# Altium PCB USB_1.0_ZM_20210719.PcbDoc
Units mm, origin at the board's own origin, x right, y up, seen from the top; angles counter-clockwise.
Board outline 15 x 23 mm, 2 copper layers (Top Layer, Bottom Layer); 2 components, 4 nets, 19 pads, 9 vias.
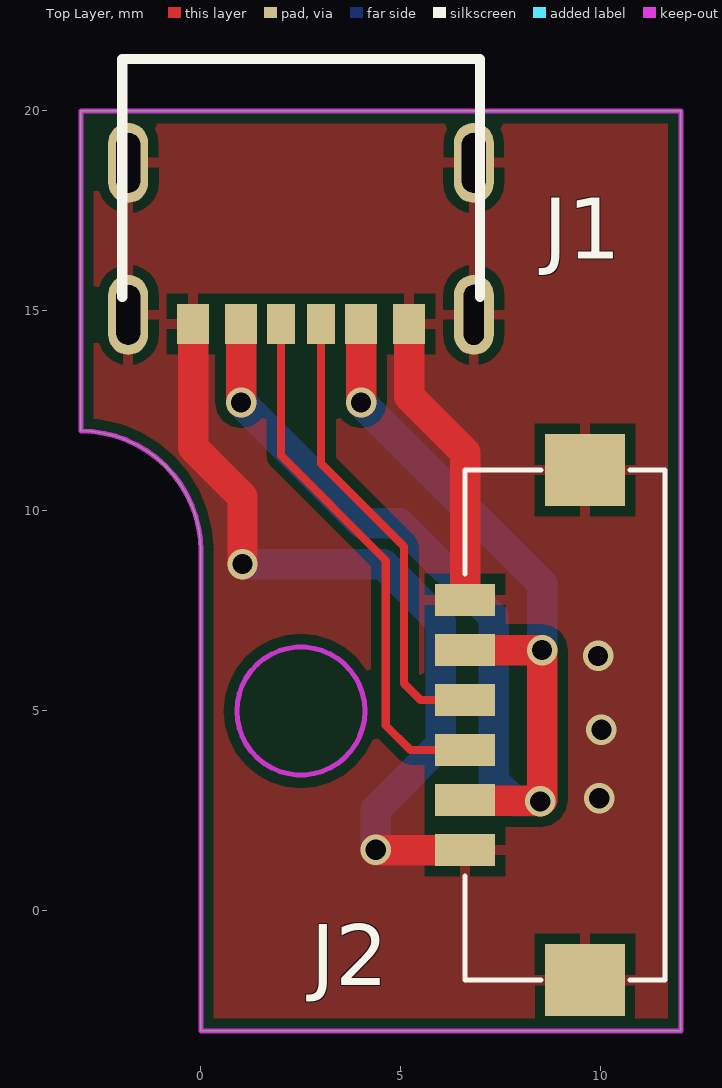
[diagram p0: Top Layer view]
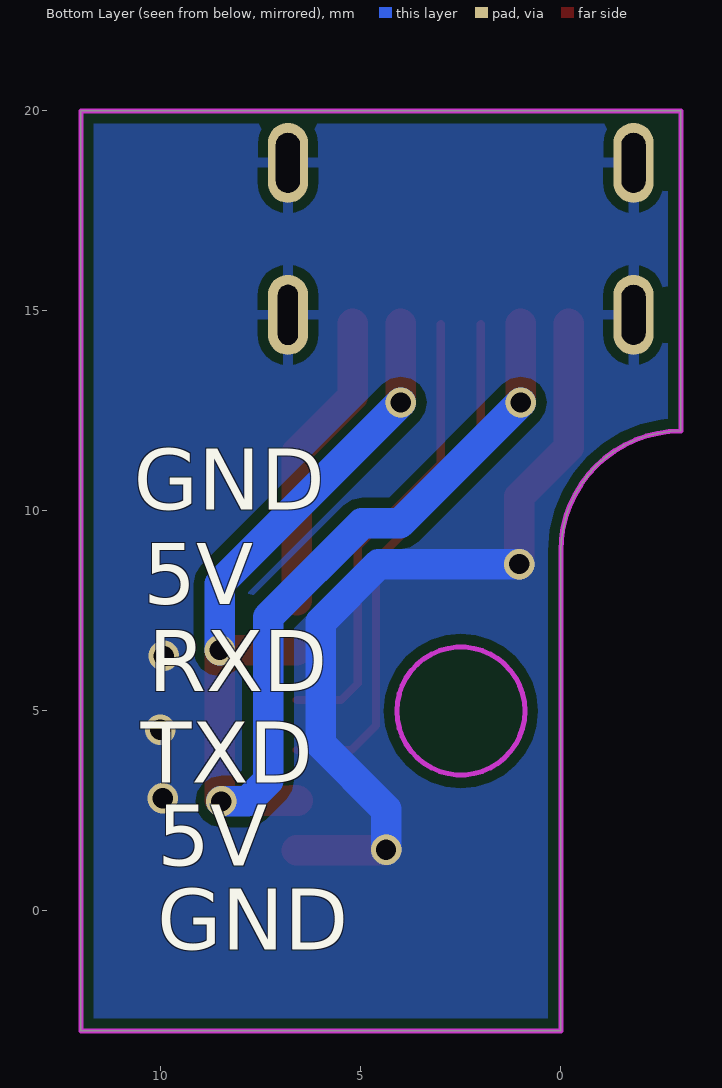
[diagram p1: Bottom Layer view, seen from below]

## Layer stack, top to bottom
Top Solder: solder mask 0.0102, Solder Resist, Dk 3.5
Top Layer: signal copper 0.0356
Dielectric1: dielectric 0.32, FR-4, Dk 4.8
Bottom Layer: signal copper 0.0356
Bottom Solder: solder mask 0.0102, Solder Resist, Dk 3.5

## Board outline
0,-3 0,9 ccw(c-3,9) -3,12 -3,20 12,20 12,-3

## Design rules (kind name [scope] priority, off if disabled: settings)
Clearance [All] p1: gap=0.254
PolygonConnect PolygonConnect_1 [IsVia] p1: connectstyle=Direct reliefconductorwidth=0.254 reliefentries=4 polygonreliefangle="90 Angle" airgapwidth=0.254
PolygonConnect [All] p2: connectstyle=Relief reliefconductorwidth=0.254 reliefentries=4 polygonreliefangle="90 Angle" airgapwidth=0.254
RoutingVias [All] p1: holewidth=0.711 width=1.27 viastyle="Through Hole" minholewidth=0.711 minwidth=1.27 maxholewidth=0.711 maxwidth=1.27
SilkToSolderMaskClearance SilkscreenOverComponentPads [IsPad] p1: minsilkscreentomaskgap=0.254 clearancetoexposedcopper=TRUE
SolderMaskExpansion [All] p1: expansion=0.102
Width [All] p1: maxlimit=5.08 minlimit=0.152 preferedwidth=0.254
29 further rules are at their usual default settings.

## Components (designator, comment, footprint, x,y, rotation, side; value= is the part's Value field where it differs from the comment)
J1 "TYPE-C" USB-TYPE-C-6P 2.503,16.802 r180 top
J2 "6×1.25mmSMT" 6×1.25mmSMT 6.604,1.524 r90 top

## Footprints (in the part's own frame and the unit in brackets; to place one, negate y for a bottom-side part, rotate by r counter-clockwise, add the part's x,y. Pads: shape width x height; smd on the part's side, far side on the other; paste and mask are expansions set on the pad)
6×1.25mmSMT [mm]
  rect 1.8x2 smd: 0(-3.25,-3) 0(9.5,-3)
  rect 0.8x1.5 smd: 1(0,0) 2(1.25,0) 3(2.5,0) 4(3.75,0) 5(5,0) 6(6.25,0)
  round 0.5 on Top Overlay: ""(-0.875,0.432)
  silkscreen extent -3.25,-5 9.5,0
USB-TYPE-C-6P [mm] "USN MINI"
  oval 1x2 hole 0.6 slot 1.5 at 90 deg: 0(-4.32,-1.9) 0(4.32,-1.9) 0(4.32,1.9)
  oval 1x2 hole 0.5 slot 1.5 at 90 deg: 0(-4.32,1.9)
  rect 0.8x1 smd: 1(-2.7,2.126) 2(-1.5,2.126) 5(1.5,2.126) 6(2.7,2.126)
  rect 0.7x1 smd: 3(-0.5,2.126) 4(0.5,2.126)
  silkscreen extent -4.47,-4.5 4.47,1.45, body extent -4.47,-5.21 4.47,2.69, height 3.08

## Part data
J1 J2: library part SIP-6, "USB 3.1 Type-C 2.0短体母座 6P贴片式"

## Via types
v1: diameter 0.762, hole 0.508, Top Layer to Bottom Layer, tented both sides, 9 vias

## Nets (pads, with @x,y where several pads share a name; then routed paths per layer and width w, separated by ;. In a path a pad name is that pad's centre, name@x,y a point inside that pad or via, vN(x,y) a via of type N, cw(c..) or ccw(c..) an arc to the next point about the centre after c; other vN are vias at no path point)
GND: J1.0 J1.1 J1.6 J2.0 J2.1 J2.6 | length 28.2
  Top Layer w0.762: J1.6 -0.197,11.59 1.04,10.354 v1(1.04,8.673) ; v1(4.37,1.529) 4.376,1.524 J2.1 ; J1.1 5.203,12.872 6.604,11.471 J2.6
  Bottom Layer w0.762: v1(1.04,8.673) 4.553,8.673 5.999,7.227 5.999,4.167 4.37,2.538 v1(4.37,1.529)
  other v1: 9.958,2.819 10.014,4.531 9.93,6.376
NetJ1_3: J1.3 J2.4 | length 11.5
  Top Layer w0.203: J1.3 3.003,11.185 5.079,9.11 5.079,5.688 5.493,5.274 J2.4
NetJ1_4: J1.4 J2.3 | length 13.4
  Top Layer w0.203: J1.4 2.003,11.385 4.621,8.767 4.621,4.641 5.239,4.024 J2.3
V5.0: J1.2 J1.5 J2.2 J2.5 | length 33.7
  Top Layer w0.762: v1(1.003,12.713) J1.5 ; v1(4.003,12.713) J1.2 ; J2.2@6.582,2.759 v1@8.467,2.759 ; J2.2 J2.2@6.731,2.774 ; J2.5 v1(8.528,6.524) 8.528,2.779 v1(8.487,2.739)
  Bottom Layer w0.762: v1(1.003,12.713) 4.027,9.689 4.974,9.689 7.322,7.341 7.322,3.256 7.839,2.739 v1(8.487,2.739) ; v1(4.003,12.713) 8.534,8.182 v1@8.534,6.518
pads on no net: J2.

## Polygon pours and split planes (outlines as drawn)
GND on Top Layer "Top Layer-No Net" (solid, remove dead copper, pour order 0): -5.514,22.356 -4.65,21.491 18.069,21.491 18.069,-0.285 14.375,-3.98 14.296,-3.901 6.788,-3.901 -3.51,-3.901 -5.396,-2.014 -5.161,-1.778 -5.161,21.648
GND on Bottom Layer "Top Layer-No Net" (solid, remove dead copper, pour order 2): -5.514,22.356 -4.65,21.491 18.069,21.491 18.069,-0.285 14.375,-3.98 14.296,-3.901 6.788,-3.901 -3.51,-3.901 -5.396,-2.014 -5.161,-1.778 -5.161,21.648

## Keep-outs
Keep-Out Layer:
  circle w0.127: c2.5,5 r1.6
  lines w0.127: 6.97,20 12,20 12,-3 0,-3 0,9 ccw(c-3,9) -3,12 -3,20 6.97,20

## Silkscreen, mask and mechanical layers (free items; w line width, h text height)
Bottom Overlay:
  text "GND" at 10.681,10.036 h1.52
  text "5V" at 10.437,7.668 h1.52
  text "RXD" at 10.315,5.496 h1.52
  text "TXD" at 10.51,3.202 h1.52
  text "5V" at 10.095,1.127 h1.52
  text "GND" at 10.095,-0.972 h1.52
Mechanical 1:
  circle w0.127: c2.5,5 r1.6
  lines w0.127: 6.97,20 12,20 12,-3 0,-3 0,9 ccw(c-3,9) -3,12 -3,20 6.97,20
Mechanical 2:
  lines w0.127: -1.67,13.695 -1.67,13.495 -1.97,13.495 -1.97,13.695 ; -1.47,13.695 -1.47,13.495 -0.97,13.495 0.45,13.495 ; -0.6,13.495 -0.6,13.405 -0.4,13.405 -0.4,13.495 ; -0.1,13.495 -0.1,13.405 0.1,13.405 0.1,13.495 ; 0.4,13.495 0.4,13.405 0.6,13.405 0.6,13.495 ; 0.9,13.495 0.9,13.405 1.1,13.405 1.1,13.495 ; 1.4,13.495 1.4,13.405 1.6,13.405 1.6,13.495 ; 1.9,13.495 1.9,13.405 2.1,13.405 2.1,13.495 ; 2.9,13.495 2.9,13.405 3.1,13.405 3.1,13.495 ; 3.4,13.495 3.4,13.405 3.6,13.405 3.6,13.495 ; 3.9,13.495 3.9,13.405 4.1,13.405 4.1,13.495 ; 4.4,13.495 4.4,13.405 4.6,13.405 4.6,13.495 ; 4.9,13.495 4.9,13.405 5.1,13.405 5.1,13.495 ; 5.4,13.495 5.4,13.405 5.6,13.405 5.6,13.495 ; 6.67,13.695 6.67,13.495 6.97,13.495 6.97,13.695 ; -1.97,13.695 -0.67,13.695 0.45,13.695 0.45,13.495 ; -1.97,13.695 -1.97,21.305 -0.67,21.305 5.67,21.305 6.97,21.305 ; 0.45,13.495 1.25,13.495 ; 1.25,13.495 3.75,13.495 ; 1.25,13.495 1.25,13.695 3.75,13.695 3.75,13.495 ; 3.75,13.495 4.55,13.495 ; 4.55,13.495 5.97,13.495 6.47,13.495 ; 4.55,13.495 4.55,13.695 5.67,13.695 6.97,13.695 ; 6.47,13.495 6.47,13.695 6.47,13.495 ; 6.97,13.695 6.97,21.305 ; 6.97,13.695 6.97,21.305 ; -0.3,14.925 ccw(c0,14.925) 0,14.625 1.5,14.625 ccw(c1.5,14.725) 1.6,14.725 1.6,14.825 ccw(c1.5,14.825) 1.5,14.925 0.3,14.925 cw(c0.3,15.125) 0.1,15.125 0.1,15.325 cw(c0.3,15.325) 0.3,15.525 1.5,15.525 ccw(c1.5,15.625) 1.6,15.625 1.6,15.725 ccw(c1.5,15.725) 1.5,15.825 0.342,15.825 ccw(c0.342,15.182) -0.3,15.182 -0.3,14.925 ; 3.4,14.725 ccw(c3.5,14.725) 3.5,14.625 5,14.625 ccw(c5,14.925) 5.3,14.925 5.3,15.525 ccw(c5,15.525) 5,15.825 3.5,15.825 ccw(c3.5,15.725) 3.4,15.725 3.4,15.625 ccw(c3.5,15.625) 3.5,15.525 4.7,15.525 cw(c4.7,15.325) 4.9,15.325 4.9,15.125 cw(c4.7,15.125) 4.7,14.925 3.5,14.925 ccw(c3.5,14.825) 3.4,14.825 3.4,14.725